# Altium PCB SpinASM.PcbDoc
Units mm, origin at the board's own origin, x right, y up, seen from the top; angles counter-clockwise.
Board outline 49.5 x 20 mm, 2 copper layers (Top Layer, Bottom Layer); 27 components, 26 nets, 115 pads, 71 vias.
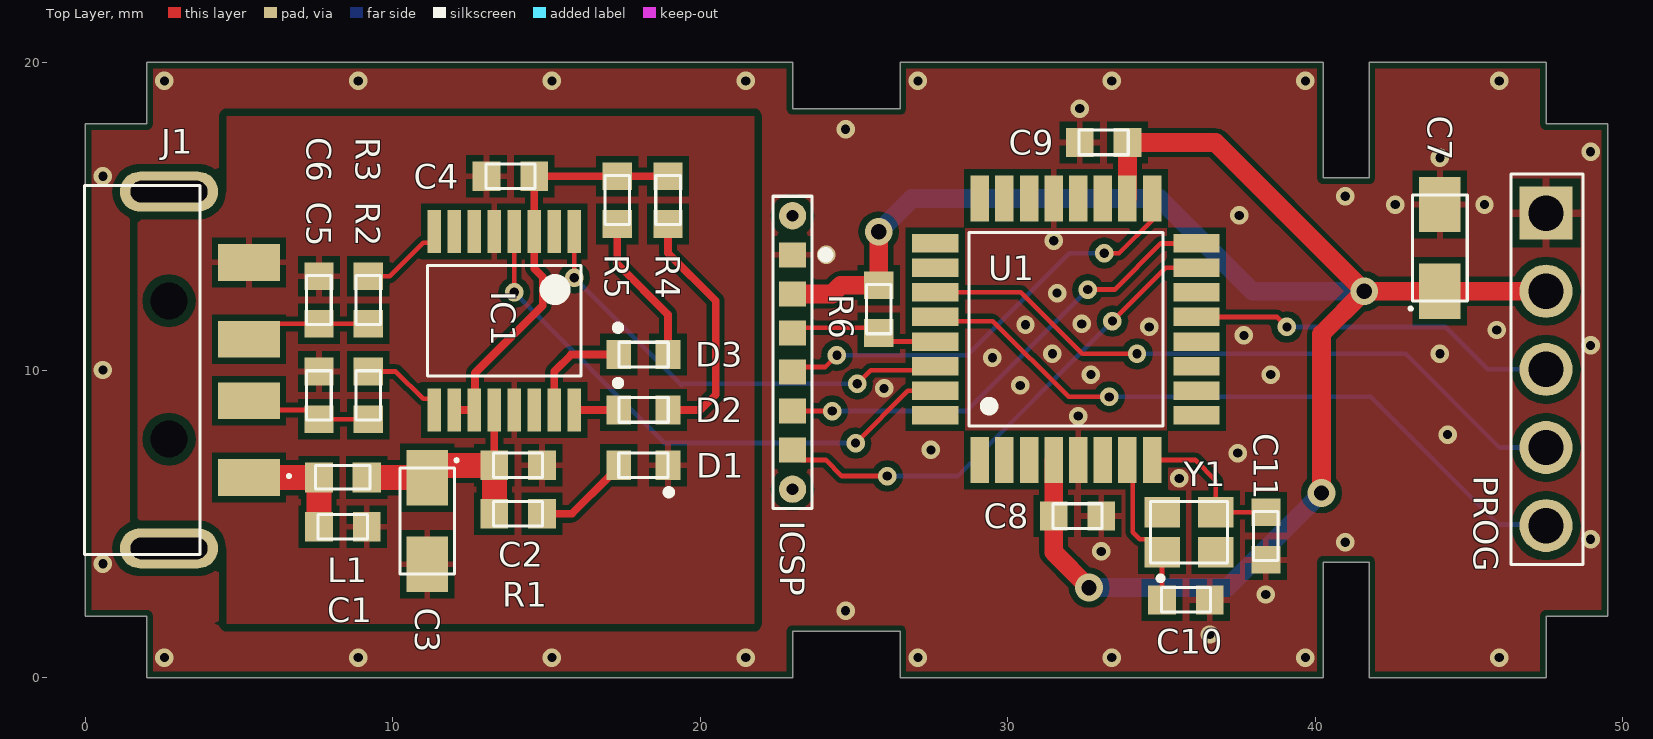
[diagram p0: Top Layer view]
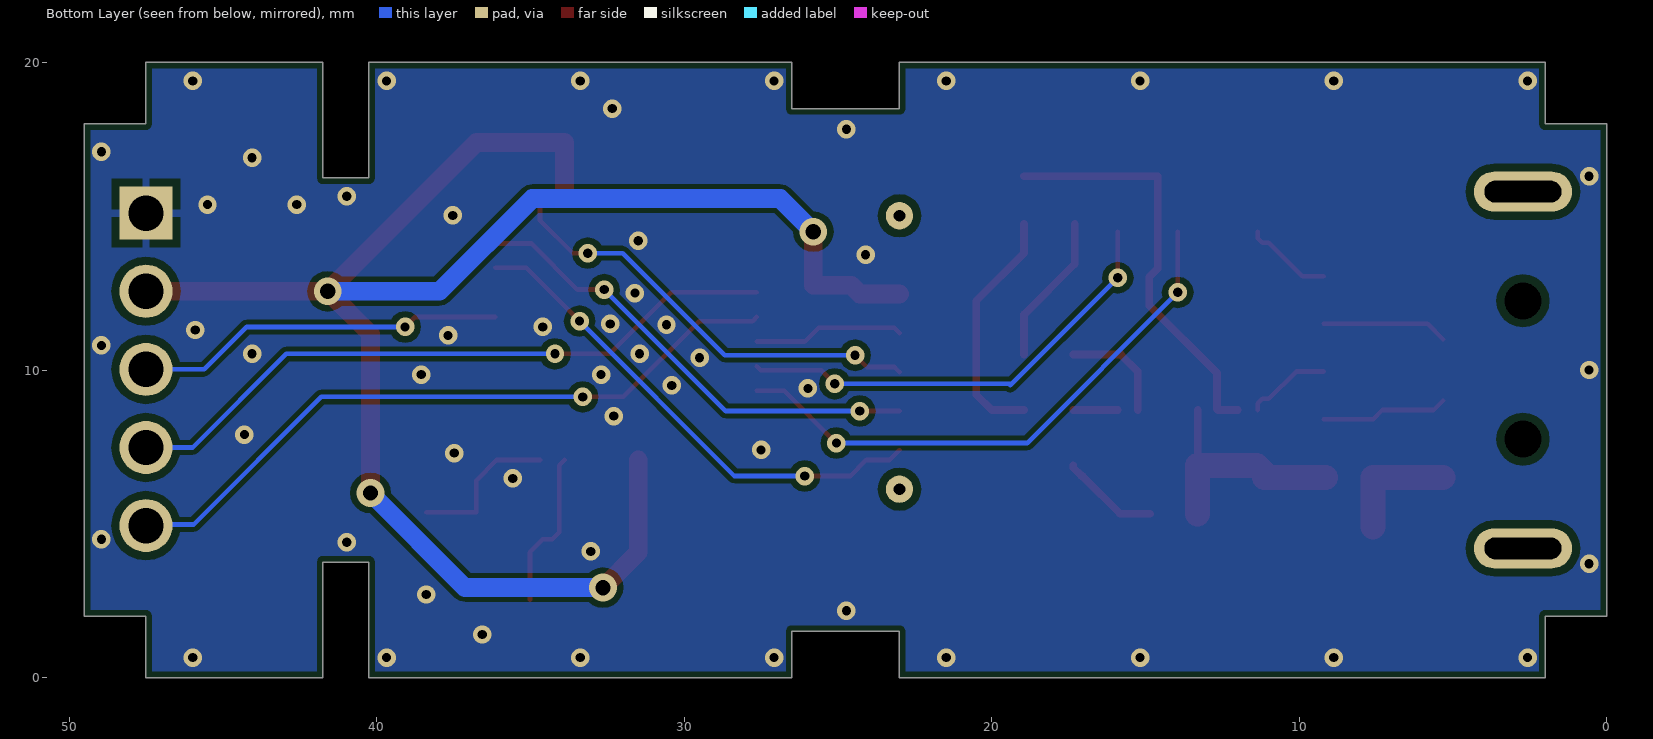
[diagram p1: Bottom Layer view, seen from below]
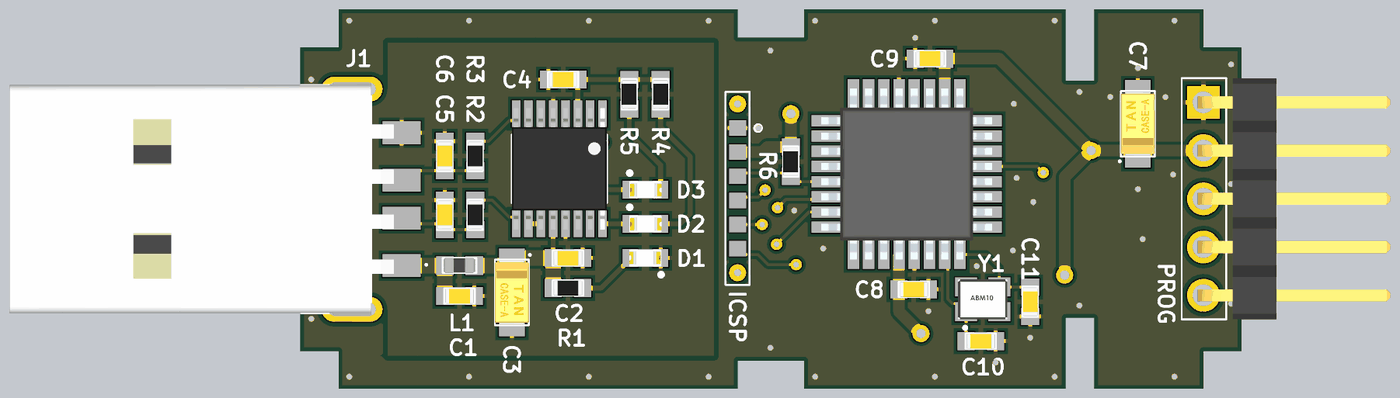
[diagram p2: 3D render of the assembled board from above, using the file's embedded part models]

## Layer stack, top to bottom
Top Solder: solder mask 0.0102, Solder Resist, Dk 3.5
Top Layer: signal copper 0.0356
Dielectric 1: dielectric 0.32, FR-4, Dk 4.8
Bottom Layer: signal copper 0.0356
Bottom Solder: solder mask 0.0102, Solder Resist, Dk 3.5

## Board outline
23,20 23,18.5 26.5,18.5 26.5,20 40.25,20 40.25,16.25 41.75,16.25 41.75,20 47.5,20 47.5,18 49.5,18 49.5,2 47.5,2 47.5,0 41.75,0 41.75,3.75 40.25,3.75 40.25,0 26.5,0 26.5,1.5 23,1.5 23,0 2,0 2,2 0,2 0,18 2,18 2,20

## Design rules (kind name [scope] priority, off if disabled: settings)
BoardOutlineClearance [All] p1: gap=0.2 ignorepadtopadclearanceinfootprint=FALSE
Clearance [All] p1: gap=0.152 ignorepadtopadclearanceinfootprint=FALSE except(0: Arc-Text Track-Text SMDPad-Text THPad-Text Via-Text Fill-Text Poly-Text Region-Text Text-Text; 0.127: Arc-Via Track-Via SMDPad-Via Via-Via; 0.203: SMDPad-Fill SMDPad-Poly SMDPad-Region Via-Fill Via-Poly Via-Region; 0.25: Arc-Hole Track-Hole SMDPad-Hole THPad-Hole Via-Hole Fill-Hole Poly-Hole Region-Hole Text-Hole; 0.254: THPad-Fill THPad-Poly THPad-Region Fill-Fill Fill-Poly Fill-Region Poly-Poly Poly-Region Region-Region)
ComponentClearance [All] p1 off: gap=0.127 collisioncheckmode=3 verticalgap=0.127 showdistances=TRUE
DiffPairsRouting [All] p1: maxlimit=0.254 minlimit=0.127 mostfreqgap=0.127 toplayer_minwidth=0.127 toplayer_maxwidth=25.4 toplayer_prefwidth=0.127 bottomlayer_minwidth=0.127 bottomlayer_maxwidth=25.4 bottomlayer_prefwidth=0.127 maxuncoupledlength=12.7
Height [All] p1: minheight=0 maxheight=1816.048 prefheight=12.7
HoleSize [All] p1: absolutevalues=TRUE maxlimit=6.3 minlimit=0.3 maxpercent=80.000 minpercent=20.000
HoleToHoleClearance [All] p1: gap=0.25 allowstackedmicrovias=FALSE
MinimumAnnularRing [All] p1: minimumring=0.076
MinimumSolderMaskSliver [All] p1: minsoldermaskwidth=0
PlaneClearance [All] p1: clearance=0.254
PlaneConnect PlaneConnectPowerPads [InPadClass('PowerPads')] p1: planeconnectstyle=Direct reliefexpansion=0.508 reliefentries=4 reliefconductorwidth=0.254 reliefairgap=0.254
PlaneConnect [All] p2: pad.planeconnectstyle=Relief pad.reliefexpansion=0.3 pad.reliefentries=4 pad.reliefconductorwidth=0.254 pad.reliefairgap=0.254 via.planeconnectstyle=Direct via.reliefexpansion=0.3 via.reliefentries=4 via.reliefconductorwidth=0.127 via.reliefairgap=0.127
PolygonConnect PolygonConnectPowerPads [All vs (InPadClass('PowerPads'))] p1: connectstyle=Direct reliefconductorwidth=0.254 reliefentries=4 polygonreliefangle="90 Angle" airgapwidth=0.254
PolygonConnect [All] p2: thpad.connectstyle=Relief thpad.reliefconductorwidth=0.254 thpad.reliefentries=4 thpad.polygonreliefangle="90 Angle" thpad.airgapwidth=0.254 smdpad.connectstyle=Relief smdpad.reliefconductorwidth=0.203 smdpad.reliefentries=4 smdpad.polygonreliefangle="90 Angle" smdpad.airgapwidth=0.203 via.connectstyle=Direct via.reliefconductorwidth=0.127 via.reliefentries=4 via.polygonreliefangle="90 Angle" via.airgapwidth=0.127
RoutingVias [All] p1: holewidth=0.3 width=0.6 viastyle="Through Hole" minholewidth=0.3 minwidth=0.6 maxholewidth=0.6 maxwidth=6.6
SilkToSilkClearance [All] p1 off: silktosilkclearance=0
SilkToSolderMaskClearance [IsPad] p1 off: minsilkscreentomaskgap=0.127 clearancetoexposedcopper=TRUE
SolderMaskExpansion [All] p1: expansion=0.075 istentingtop=FALSE
Width [All] p1: maxlimit=0.813 minlimit=0.152 preferedwidth=0.254
20 further rules are at their usual default settings.

## Components (designator, comment, footprint, x,y, rotation, side; value= is the part's Value field where it differs from the comment)
C1 "10n" CHIP_0603 8.375,4.9 r0 top
C2 "100n" CHIP_0603 14.075,6.9 r0 top
C3 "4.7u" TAN_1206 11.125,5.09 r270 top
C4 "100n" CHIP_0603 13.825,16.3 r180 top
C5 "47p" CHIP_0603 7.6,9.175 r90 top
C6 "47p" CHIP_0603 7.6,12.275 r90 top
C7 "10u" TAN_1206 44.05,13.97 r90 top
C8 "100n" CHIP_0603 32.265,5.25 r0 top
C9 "100n" CHIP_0603 33.115,17.4 r180 top
C10 "22p" CHIP_0603 35.79,2.525 r0 top
C11 "22p" CHIP_0603 38.39,4.6 r270 top
D1 "MP001249" LED_0603 18.15,6.9 r180 top
D2 "MP001249" LED_0603 18.15,8.7 r0 top
D3 "MP001249" LED_0603 18.15,10.5 r0 top
IC1 "FT230X" TSSOP-16 13.625,11.6 r270 top
ICSP "ICSP" AVRISP_POGO 23,10.57 r0 top
J1 "USB_MALE" USB_MALE 3,10 r270 top locked
L1 "BLM18AG331SN1D" INDC1608X10 8.39,6.5 r180 top
PROG "J_HEADER_5PINS_MALE_90" HEADER_5PINS_MALE_90 47.5,15.1 r270 top locked
R1 "330R" CHIP_R_0603 14.075,5.325 r0 top
R2 "27R" CHIP_R_0603 9.2,9.175 r90 top
R3 "27R" CHIP_R_0603 9.2,12.275 r90 top
R4 "330R" CHIP_R_0603 18.95,15.525 r270 top
R5 "330R" CHIP_R_0603 17.3,15.525 r270 top
R6 "10k" CHIP_R_0603 25.8,11.98 r270 top
U1 "ATMEGA328PB" TQFP32 31.89,11.325 r90 top
Y1 "ABM10" ABM10-167 35.89,4.725 r0 top

## Footprints (in the part's own frame and the unit in brackets; to place one, negate y for a bottom-side part, rotate by r counter-clockwise, add the part's x,y. Pads: shape width x height; smd on the part's side, far side on the other; paste and mask are expansions set on the pad)
ABM10-167 [mm]
  rect 1.15x1 smd: 1(-0.875,-0.65) 2(0.875,0.65) ""(-0.875,0.65) ""(0.875,-0.65)
  silkscreen extent -1.25,-1.56 1.25,1, body extent -1.3,-1.05 1.3,1.05, height 0.7
AVRISP_POGO [mil]
  rect 35x32 smd: 1(0,125) 2(0,75) 3(0,25) 4(0,-25) 5(0,-75) 6(0,-125)
  round 35 hole 15: ""(0,-175) ""(0,175)
  silkscreen extent -25,-200 46,200
CHIP_0603 [mm] "Chip Capacitor, 2-Leads, Body 1.60x0.80mm, IPC Medium Density"
  rect 0.9x0.95 smd: 1(-0.775,0) 2(0.775,0)
  silkscreen extent -0.8,-0.4 0.8,0.4, body extent -0.75,-0.4 0.75,0.4, height 0.65
CHIP_R_0603 [mm] "Chip Resistor, 2-Leads, Body 1.60x0.80mm, IPC Medium Density"
  rect 0.9x0.95 smd: 1(-0.775,0) 2(0.775,0)
  silkscreen extent -0.8,-0.4 0.8,0.4, body extent -0.75,-0.4 0.75,0.4, height 0.63
HEADER_5PINS_MALE_90 [mm]
  rect 1.725x1.725 hole 1.15: 1(0,0)
  round 1.725 hole 1.15: 2(2.54,0) 3(5.08,0) 4(7.62,0) 5(10.16,0)
  silkscreen extent -1.27,-1.14 11.43,1.2, body extent -1.27,-0.3 11.43,9.83, height 2.51
INDC1608X10 [mm] "Chip Inductor, 2-Leads, Body 1.60x0.80mm, IPC Medium Density"
  rect 0.92x0.98 smd: 1(-0.762,0) 2(0.79,0)
  silkscreen extent -0.87,-0.4 0.9,0.38, body extent -0.77,-0.4 0.83,0.4, height 1
LED_0603 [mm]
  rect 0.8x0.95 smd: 1(-0.8,0) 2(0.8,0)
  silkscreen extent -0.92,-0.4 0.81,0.97, body extent -0.8,-0.38 0.85,0.35, height 0.68
TAN_1206 [mm] "Chip Capacitor, 2-Leads, Body 3.20x1.60mm, IPC Medium Density"
  rect 1.8x1.35 smd: +(-1.41,0) -(1.41,0)
  silkscreen extent -2.02,-0.89 1.73,1, body extent -1.7,-0.9 1.7,0.9, height 1.8
TQFP32 [mm]
  rect 1.5x0.6 smd: 1(-4.25,2.8) 2(-4.25,2) 3(-4.25,1.2) 4(-4.25,0.4) 5(-4.25,-0.4) 6(-4.25,-1.2) 7(-4.25,-2) 8(-4.25,-2.8) 17(4.25,-2.8) 18(4.25,-2) 19(4.25,-1.2) 20(4.25,-0.4) 21(4.25,0.4) 22(4.25,1.2) 23(4.25,2) 24(4.25,2.8)
  rect 0.6x1.5 smd: 9(-2.8,-4.25) 10(-2,-4.25) 11(-1.2,-4.25) 12(-0.4,-4.25) 13(0.4,-4.25) 14(1.2,-4.25) 15(2,-4.25) 16(2.8,-4.25) 25(2.8,4.25) 26(2,4.25) 27(1.2,4.25) 28(0.4,4.25) 29(-0.4,4.25) 30(-1.2,4.25) 31(-2,4.25) 32(-2.8,4.25)
  silkscreen extent -3.15,-3.15 3.15,3.15, body extent -4.5,-4.5 4.5,4.5, height 1.2
TSSOP-16 [mm] "TSOP, 16-Leads, Body 4.95x4.35mm, Pitch 0.65mm, IPC Medium Density"
  rect 1.4x0.45 smd: 1(-2.9,2.275) 2(-2.9,1.625) 3(-2.9,0.975) 4(-2.9,0.325) 5(-2.9,-0.325) 6(-2.9,-0.975) 7(-2.9,-1.625) 8(-2.9,-2.275) 9(2.9,-2.275) 10(2.9,-1.625) 11(2.9,-0.975) 12(2.9,-0.325) 13(2.9,0.325) 14(2.9,0.975) 15(2.9,1.625) 16(2.9,2.275)
  silkscreen extent -1.8,-2.5 1.8,2.5, body extent -3.2,-2.5 3.2,2.5, height 1.2
USB_MALE [mm]
  rect 1.2x2 smd: 1(3.5,2.325) 2(1,2.325) 3(-1,2.325) 4(-3.5,2.325)
  oval 1.3x3.2 hole 0.7 slot 2.5 at 90 deg: 5(-5.8,-0.275) 5(5.8,-0.275)
  round 0.6 hole 1.2 unplated: ""(-2.25,-0.275) ""(2.25,-0.275)
  silkscreen extent -6,-3.03 6,3.67, body extent -6.23,-18.28 6.2,3.33, height 4

## Part data
C1: library part MC0603B103K500CT, "CAP CER 10NF 50V X7R 0603", Capacitance=10nF, Case Code (Imperial)=0603, Case Code (Metric)=1608, Dielectric=X7R, Manufacturer=Multicomp, Max Operating Temperature=125°C, Min Operating Temperature=-55°C, Supplier Part Number 1=1759102, Tolerance=10%, Voltage Rating=50V, Case/Package=0603, Category="Ceramic Capacitors", ComponentLink1Description=https://datasheet.ciiva.com/22675/1901289-22675356.pdf?src-supplier=Element14, ComponentLink1URL=https://datasheet.ciiva.com/22675/1901289-22675356.pdf?src-supplier=Element14, ComponentLink2Description=https://datasheet.ciiva.com/22675/1901289-22675357.pdf?src-supplier=Element14, ComponentLink2URL=https://datasheet.ciiva.com/22675/1901289-22675357.pdf?src-supplier=Element14, Manufacturer Part Number=MC0603B103K500CT, Number of Pins=2, Packaging="Tape and Reel", Price=0.0147, REACH SVHC=Unknown, RoHS=Yes, Stock 1=112880, Supplier 1=Farnell, Voltage Rating (DC)=50V, Width=0.8mm
C2 C4 C8 C9: library part MC0603B104K500CT, "CAP CER 100NF 50V X7R 0603", Capacitance=100nF, Case Code (Imperial)=0603, Case Code (Metric)=1608, Dielectric=X7R, Manufacturer=Multicomp, Max Operating Temperature=125°C, Min Operating Temperature=-55°C, Supplier Part Number 1=1759122, Tolerance=10%, Voltage Rating=50V, Case/Package=0603, ComponentLink1Description=https://datasheet.ciiva.com/22686/1901289-22686278.pdf?src-supplier=Element14, ComponentLink1URL=https://datasheet.ciiva.com/22686/1901289-22686278.pdf?src-supplier=Element14, ComponentLink2Description=https://datasheet.ciiva.com/22686/1901289-22686279.pdf?src-supplier=Element14, ComponentLink2URL=https://datasheet.ciiva.com/22686/1901289-22686279.pdf?src-supplier=Element14, ComponentLink3Description=https://datasheet.ciiva.com/22648/1901289-22648411.pdf?src-supplier=Element14, ComponentLink3URL=https://datasheet.ciiva.com/22648/1901289-22648411.pdf?src-supplier=Element14, Manufacturer Part Number=MC0603B104K500CT, Number of Pins=2, Packaging="Cut Tape", Price=0.0458, REACH SVHC=Unknown, RoHS=Yes, Stock 1=1057763, Supplier 1=Farnell, Voltage Rating (DC)=50V
C3: library part T491A475K010AT, "CAP TANT 4.7UF 10V", Capacitance=4.7uF, Case Code (Imperial)=1206, Case Code (Metric)=3216, Dielectric Material=Tantalum, ESR (Equivalent Series Resistance)=5R, Leakage Current=500nA, Manufacturer=KEMET, Max Operating Temperature=125°C, Min Operating Temperature=-55°C, Package Quantity=1, Ripple Current=122mA, Supplier Part Number 1=1457427, Tolerance=20%, Voltage=10V, Case/Package=1206, Category="Tantalum Capacitors", ComponentLink1Description=https://datasheet.ciiva.com/257/kem-t2005-t491-257408.pdf?src-supplier=Digi-Key, ComponentLink1URL=https://datasheet.ciiva.com/257/kem-t2005-t491-257408.pdf?src-supplier=Digi-Key, ComponentLink2Description=https://datasheet.ciiva.com/7668/1732747-7668019.pdf?src-supplier=Element14, ComponentLink2URL=https://datasheet.ciiva.com/7668/1732747-7668019.pdf?src-supplier=Element14, ComponentLink3Description=https://datasheet.ciiva.com/27052/1573417-27052564.pdf?src-supplier=Jameco, ComponentLink3URL=https://datasheet.ciiva.com/27052/1573417-27052564.pdf?src-supplier=Jameco, ComponentLink4Description=https://datasheet.ciiva.com/14589/70095774-14589016.pdf?src-supplier=Allied+Electronics, ComponentLink4URL=https://datasheet.ciiva.com/14589/70095774-14589016.pdf?src-supplier=Allied+Electronics, ComponentLink5Description=https://datasheet.ciiva.com/257/kem-t2005-t491-257409.pdf?src-supplier=Digi-Key, ComponentLink5URL=https://datasheet.ciiva.com/257/kem-t2005-t491-257409.pdf?src-supplier=Digi-Key, ComponentLink6Description=https://datasheet.ciiva.com/7668/1446014-7668021.pdf?src-supplier=Element14, ComponentLink6URL=https://datasheet.ciiva.com/7668/1446014-7668021.pdf?src-supplier=Element14, ComponentLink7Description=https://datasheet.ciiva.com/14588/70095774-14588348.pdf?src-supplier=Allied+Electronics, ComponentLink7URL=https://datasheet.ciiva.com/14588/70095774-14588348.pdf?src-supplier=Allied+Electronics, ComponentLink8Description=https://datasheet.ciiva.com/257/kem-t2005-t491-257407.pdf?src-supplier=Digi-Key, ComponentLink8URL=https://datasheet.ciiva.com/257/kem-t2005-t491-257407.pdf?src-supplier=Digi-Key, Depth=1.6mm, Dissipation Factor=6%, Features="General Purpose", Height=1.6mm, Height - Seated (Max)=0.071inch, Lead Free="Lead Free", Lead Pitch=1.2mm, Length=3.2mm, Life (Hours)=2000Hour, Manufacturer Part Number=T491A475K010AT, Mount="Surface Mount,PCB", Number of Pins=2, Packaging="Tape and Reel", Polarity=Polar, Price=0.241, Radiation Hardening=No, REACH SVHC="No SVHC", RoHS=Yes, Stock 1=5135, Supplier 1=Farnell, Termination=SMD/SMT, Voltage Rating=10V, Voltage Rating (DC)=10V, Width=1.6mm
C5 C6: library part MC0603N470J500CT, "CAP CER 47PF 50V C0G/NP0 0603", Capacitance=47pF, Case Code (Imperial)=0603, Case Code (Metric)=1608, Dielectric=C0G, Manufacturer=Multicomp, Max Operating Temperature=125°C, Min Operating Temperature=-55°C, Supplier Part Number 1=1759062, Temperature Coefficient=30ppm/°C, Tolerance=5%, Voltage Rating=50V, Case/Package=0603, ComponentLink1Description=https://datasheet.ciiva.com/22648/1901289-22648503.pdf?src-supplier=Element14, ComponentLink1URL=https://datasheet.ciiva.com/22648/1901289-22648503.pdf?src-supplier=Element14, ComponentLink2Description=https://datasheet.ciiva.com/22682/1901289-22682812.pdf?src-supplier=Element14, ComponentLink2URL=https://datasheet.ciiva.com/22682/1901289-22682812.pdf?src-supplier=Element14, ComponentLink3Description=https://datasheet.ciiva.com/22682/1901289-22682813.pdf?src-supplier=Element14, ComponentLink3URL=https://datasheet.ciiva.com/22682/1901289-22682813.pdf?src-supplier=Element14, Manufacturer Part Number=MC0603N470J500CT, Number of Pins=2, Packaging="Tape and Reel", Price=0.02, Pricing="10=0.0246, 100=0.0199, 500=0.0123, 1000=0.0097, 2000=0.0089 (EUR)", REACH SVHC=Unknown, RoHS=Yes, Stock=148629, Supplier 1=Farnell, Voltage Rating (DC)=50V, Width=0.8mm
C7: library part T491A106K016AT, "CAP TANT 10UF 16V", Capacitance=10uF, Case Code (Imperial)=1206, Case Code (Metric)=3216, Dielectric Material=Tantalum, ESR (Equivalent Series Resistance)=7R, Leakage Current=1.6uA, Manufacturer=KEMET, Max Operating Temperature=125°C, Min Operating Temperature=-55°C, Package Quantity=1, Ripple Current=104mA, Supplier Part Number 1=1457414, Tolerance=10%, Voltage=16V, Case/Package=1206, Category="Tantalum Capacitors", ComponentLink1Description=https://datasheet.ciiva.com/7696/1732745-7696294.pdf?src-supplier=Element14, ComponentLink1URL=https://datasheet.ciiva.com/7696/1732745-7696294.pdf?src-supplier=Element14, ComponentLink2Description=https://datasheet.ciiva.com/34302/1573257-34302505.pdf?src-supplier=Jameco, ComponentLink2URL=https://datasheet.ciiva.com/34302/1573257-34302505.pdf?src-supplier=Jameco, ComponentLink3Description=https://datasheet.ciiva.com/7696/1854511-7696293.pdf?src-supplier=Element14, ComponentLink3URL=https://datasheet.ciiva.com/7696/1854511-7696293.pdf?src-supplier=Element14, ComponentLink4Description=https://datasheet.ciiva.com/14586/70095774-14586694.pdf?src-supplier=Allied+Electronics, ComponentLink4URL=https://datasheet.ciiva.com/14586/70095774-14586694.pdf?src-supplier=Allied+Electronics, ComponentLink5Description=https://datasheet.ciiva.com/6248/kem-t2005-t491-6248087.pdf?src-supplier=Digi-Key, ComponentLink5URL=https://datasheet.ciiva.com/6248/kem-t2005-t491-6248087.pdf?src-supplier=Digi-Key, ComponentLink6Description=https://datasheet.ciiva.com/6248/kem-t2005-t491-6248088.pdf?src-supplier=Digi-Key, ComponentLink6URL=https://datasheet.ciiva.com/6248/kem-t2005-t491-6248088.pdf?src-supplier=Digi-Key, ComponentLink7Description=https://datasheet.ciiva.com/14113/t491serie-eng-tds-14113132.pdf?src-supplier=Distrelec, ComponentLink7URL=https://datasheet.ciiva.com/14113/t491serie-eng-tds-14113132.pdf?src-supplier=Distrelec, ComponentLink8Description=https://datasheet.ciiva.com/7696/1923792-7696431.pdf?src-supplier=Element14, ComponentLink8URL=https://datasheet.ciiva.com/7696/1923792-7696431.pdf?src-supplier=Element14, ComponentLink9Description=https://datasheet.ciiva.com/7696/1854511-7696295.pdf?src-supplier=Element14, ComponentLink9URL=https://datasheet.ciiva.com/7696/1854511-7696295.pdf?src-supplier=Element14, ComponentLink10Description=https://datasheet.ciiva.com/14605/70095774-14605543.pdf?src-supplier=Allied+Electronics, ComponentLink10URL=https://datasheet.ciiva.com/14605/70095774-14605543.pdf?src-supplier=Allied+Electronics, ComponentLink11Description=https://datasheet.ciiva.com/7696/1446014-7696296.pdf?src-supplier=Element14, ComponentLink11URL=https://datasheet.ciiva.com/7696/1446014-7696296.pdf?src-supplier=Element14, ComponentLink12Description=https://datasheet.ciiva.com/6248/kem-t2005-t491-6248089.pdf?src-supplier=Digi-Key, ComponentLink12URL=https://datasheet.ciiva.com/6248/kem-t2005-t491-6248089.pdf?src-supplier=Digi-Key, ComponentLink13Description=https://datasheet.ciiva.com/12882/kem-t2005-t491-12882730.pdf?src-supplier=Mouser, ComponentLink13URL=https://datasheet.ciiva.com/12882/kem-t2005-t491-12882730.pdf?src-supplier=Mouser, ComponentLink14Description=https://datasheet.ciiva.com/39123/kem-t2005-t491-39123278.pdf?src-supplier=Onlinecomponents.com, ComponentLink14URL=https://datasheet.ciiva.com/39123/kem-t2005-t491-39123278.pdf?src-supplier=Onlinecomponents.com, ComponentLink15Description=https://datasheet.ciiva.com/29244/458306-da-01-de-kondensator-10uf-3216-10pr-16v-85c-29244588.pdf?src-supplier=Conrad, ComponentLink15URL=https://datasheet.ciiva.com/29244/458306-da-01-de-kondensator-10uf-3216-10pr-16v-85c-29244588.pdf?src-supplier=Conrad, Depth=1.6mm, Dissipation Factor=10%, Failure Rate=0.001%, Features="General Purpose", Height=1.6mm, Height - Seated (Max)=0.071inch, Lead Free="Lead Free", Lead Pitch=1.2mm, Length=3.2mm, Life (Hours)=2000Hour, Manufacturer Part Number=T491A106K016AT, Mount="Surface Mount,PCB", Number of Pins=2, Packaging="Tape and Reel", Polarity=Polar, Price=0.167, Pricing="5=0.30300, 50=0.16000, 250=0.13300, 500=0.12000, 1000=0.10200 (EUR)", Radiation Hardening=No, REACH SVHC="No SVHC", RoHS=Yes, Stock=36020, Supplier 1=Farnell, Termination=SMD/SMT, Voltage Rating=16V, Voltage Rating (DC)=16V, Width=1.6mm
C10 C11: library part MC0603N220J500CT, "CAP CER 22PF 50V C0G/NP0 0603", Capacitance=22pF, Case Code (Imperial)=0603, Case Code (Metric)=1608, Dielectric=C0G, Manufacturer=Multicomp, Max Operating Temperature=125°C, Min Operating Temperature=-55°C, Supplier Part Number 1=1759057, Temperature Coefficient=30ppm/°C, Tolerance=5%, Voltage Rating=50V, Case/Package=0603, Category="Ceramic Capacitors", ComponentLink1Description=https://datasheet.ciiva.com/22648/1901289-22648486.pdf?src-supplier=Element14, ComponentLink1URL=https://datasheet.ciiva.com/22648/1901289-22648486.pdf?src-supplier=Element14, Manufacturer Part Number=MC0603N220J500CT, Number of Pins=2, Packaging="Cut Tape", Price=0.024, REACH SVHC=Unknown, RoHS=Yes, Stock=53792, Supplier 1=Farnell, Voltage Rating (DC)=50V, Width=0.8mm
D1 D2 D3: "LED RED CMS 603 20 mA 2.5 V 629 nm", Manufacturer=Multicomp, Supplier Part Number 1=3265380, Manufacturer Part Number=MP001249, Price=0.0718, RoHS=No, Supplier 1=Farnell
IC1: library part FT230XS-R, "USB-to-UART 1-CH 512byte FIFO 5V 16-Pin SSOP T/R", Case/Package=SSOP, Manufacturer=FTDI, Max Operating Temperature=85°C, Max Supply Voltage=5.5V, Min Operating Temperature=-40°C, Min Supply Voltage=2.97V, Operating Supply Current=8mA, Operating Supply Voltage=5V, Package Quantity=3000, Supplier Part Number 1=2081321, Category="Interface ICs", ComponentLink1Description=https://datasheet.ciiva.com/1787/ds-ft230x-1787315.pdf?src-supplier=Digi-Key, ComponentLink1URL=https://datasheet.ciiva.com/1787/ds-ft230x-1787315.pdf?src-supplier=Digi-Key, ComponentLink2Description=https://datasheet.ciiva.com/4787/ds-ft230x-5395-4787571.pdf?src-supplier=Mouser, ComponentLink2URL=https://datasheet.ciiva.com/4787/ds-ft230x-5395-4787571.pdf?src-supplier=Mouser, ComponentLink3Description=https://datasheet.ciiva.com/30478/0900766b811020cb-30478167.pdf?src-supplier=RSComponents, ComponentLink3URL=https://datasheet.ciiva.com/30478/0900766b811020cb-30478167.pdf?src-supplier=RSComponents, ComponentLink4Description=https://datasheet.ciiva.com/1787/ft-x-series-1787316.pdf?src-supplier=Digi-Key, ComponentLink4URL=https://datasheet.ciiva.com/1787/ft-x-series-1787316.pdf?src-supplier=Digi-Key, ComponentLink5Description=https://datasheet.ciiva.com/1787/ft-x-series-1787317.pdf?src-supplier=Digi-Key, ComponentLink5URL=https://datasheet.ciiva.com/1787/ft-x-series-1787317.pdf?src-supplier=Digi-Key, Data Rate=12Mbps, Height=0.059inch, Interface=UART,USB, Length=5mm, Manufacturer Part Number=FT230XS-R, Mount="Surface Mount", Number of Channels=1, Number of Pins=16, Packaging="Tape and Reel", Price=1.94, RoHS=Yes, Stock 1=45264, Supplier 1=Farnell, Weight=0.004586oz, Width=0.157inch
ICSP: library part AVRISP_POGO
J1: library part 48037-2200, "USB Connectors USB A PLUG SMT STR S SHELL LEG 3.8mm L/F", Color=Black, Current Rating=1.5A, Insulation Resistance=1GR, Manufacturer=Molex, Max Operating Temperature=85°C, Max Voltage Rating (AC)=150V, Min Operating Temperature=-20°C, Supplier Part Number 1=2313729, Category=Connectors, ComponentLink1Description=https://datasheet.ciiva.com/22654/1701284-22654928.pdf?src-supplier=Element14, ComponentLink1URL=https://datasheet.ciiva.com/22654/1701284-22654928.pdf?src-supplier=Element14, ComponentLink2Description=https://datasheet.ciiva.com/16148/1690390480372200-io-nectors-16148911.pdf?src-supplier=Onlinecomponents.com, ComponentLink2URL=https://datasheet.ciiva.com/16148/1690390480372200-io-nectors-16148911.pdf?src-supplier=Onlinecomponents.com, ComponentLink3Description=https://datasheet.ciiva.com/4598/0480372200-io-connectors-146329-4598955.pdf?src-supplier=Mouser, ComponentLink3URL=https://datasheet.ciiva.com/4598/0480372200-io-connectors-146329-4598955.pdf?src-supplier=Mouser, ComponentLink4Description=https://datasheet.ciiva.com/30049/331280480372200-io-nectors-30049803.pdf?src-supplier=Onlinecomponents.com, ComponentLink4URL=https://datasheet.ciiva.com/30049/331280480372200-io-nectors-30049803.pdf?src-supplier=Onlinecomponents.com, ComponentLink5Description=https://datasheet.ciiva.com/16667/0480372200-io-connectors-16667879.pdf?src-supplier=Avnet+Europe, ComponentLink5URL=https://datasheet.ciiva.com/16667/0480372200-io-connectors-16667879.pdf?src-supplier=Avnet+Europe, Connector Type=USB,Plug, Contact Material=Brass, Contact Plating=Gold, Gender=Male, Halogen Free="Low Halogen", Housing Material=Nylon, Manufacturer Part Number=48037-2200, Mount="Surface Mount", Number of Circuits=4, Number of Contacts=4, Number of Ports=1, Number of Rows=1, Number of Terminals=4, Orientation="Right Angle", Packaging="Tape and Reel", Pitch=2mm, Price=0.794, Radiation Hardening=No, REACH SVHC=Unknown, RoHS=Yes, Stock=1058, Supplier 1=Farnell, Termination=Solder, Voltage Rating=150V, Voltage Rating (AC)=150V
L1: "MURATA         BLM18AG331SN1D            FERRITE BEAD, 0.3OHM, 500MA, 0603", Case Code (Imperial)=0603, Case Code (Metric)=1608, Current Rating=500mA, DC Resistance (DCR)=300mR, ESR (Equivalent Series Resistance)=330R, Manufacturer=Murata, Max Operating Temperature=125°C, Min Operating Temperature=-55°C, Package Quantity=1, Supplier Part Number 1=1515675, Test Frequency=100MHz, Tolerance=25%, Case/Package=0603, Category=Inductors, ComponentLink1Description=https://datasheet.ciiva.com/1466/356366-1466928.pdf?src-supplier=Element14, ComponentLink1URL=https://datasheet.ciiva.com/1466/356366-1466928.pdf?src-supplier=Element14, ComponentLink2Description=https://datasheet.ciiva.com/19458/1844740-19458419.pdf?src-supplier=Jameco, ComponentLink2URL=https://datasheet.ciiva.com/19458/1844740-19458419.pdf?src-supplier=Jameco, ComponentLink3Description=https://datasheet.ciiva.com/18093/getdatasheetpartid-220856-18093188.pdf?src-supplier=Verical, ComponentLink3URL=https://datasheet.ciiva.com/18093/getdatasheetpartid-220856-18093188.pdf?src-supplier=Verical, ComponentLink4Description=https://datasheet.ciiva.com/11800/0900766b811b5866-11800887.pdf?src-supplier=RSComponents, ComponentLink4URL=https://datasheet.ciiva.com/11800/0900766b811b5866-11800887.pdf?src-supplier=RSComponents, ComponentLink5Description=https://datasheet.ciiva.com/41449/001171689-da-01-en-chip-drossel0603-330r-500ma-1-6x0-8mm-41449370.pdf?src-supplier=Conrad, ComponentLink5URL=https://datasheet.ciiva.com/41449/001171689-da-01-en-chip-drossel0603-330r-500ma-1-6x0-8mm-41449370.pdf?src-supplier=Conrad, ComponentLink6Description=https://datasheet.ciiva.com/41449/001172225-da-01-en-drossel-0603-330r-1-6x0-8mm-4000st-41449519.pdf?src-supplier=Conrad, ComponentLink6URL=https://datasheet.ciiva.com/41449/001172225-da-01-en-drossel-0603-330r-1-6x0-8mm-4000st-41449519.pdf?src-supplier=Conrad, ComponentLink7Description=https://datasheet.ciiva.com/16420/l0110s0100blm18a-16420761.pdf?src-supplier=Future+Electronics, ComponentLink7URL=https://datasheet.ciiva.com/16420/l0110s0100blm18a-16420761.pdf?src-supplier=Future+Electronics, ComponentLink8Description=https://datasheet.ciiva.com/1012/l0110s0100blm18a-1012044.pdf?src-supplier=Digi-Key, ComponentLink8URL=https://datasheet.ciiva.com/1012/l0110s0100blm18a-1012044.pdf?src-supplier=Digi-Key, ComponentLink9Description=https://datasheet.ciiva.com/3081/l0110s0100blm18a-3081612.pdf?src-supplier=Avnet, ComponentLink9URL=https://datasheet.ciiva.com/3081/l0110s0100blm18a-3081612.pdf?src-supplier=Avnet, ComponentLink10Description=https://datasheet.ciiva.com/1012/l0110s0100blm18a-1012045.pdf?src-supplier=Digi-Key, ComponentLink10URL=https://datasheet.ciiva.com/1012/l0110s0100blm18a-1012045.pdf?src-supplier=Digi-Key, ComponentLink11Description=https://datasheet.ciiva.com/17279/l0110s0100blm18a-17279501.pdf?src-supplier=Avnet+Europe, ComponentLink11URL=https://datasheet.ciiva.com/17279/l0110s0100blm18a-17279501.pdf?src-supplier=Avnet+Europe, ComponentLink12Description=https://datasheet.ciiva.com/1012/l0110s0100blm18a-1012046.pdf?src-supplier=Digi-Key, ComponentLink12URL=https://datasheet.ciiva.com/1012/l0110s0100blm18a-1012046.pdf?src-supplier=Digi-Key, ComponentLink13Description=https://datasheet.ciiva.com/1466/356366-1466927.pdf?src-supplier=Element14, ComponentLink13URL=https://datasheet.ciiva.com/1466/356366-1466927.pdf?src-supplier=Element14, Core Material=Ferrite, Depth=0.8mm, Height=0.8mm, Impedance=330R, Lead Free="Lead Free", Length=1.6mm, Manufacturer Part Number=BLM18AG331SN1D, Material=Ferrite,Steel, Max Current Rating=500mA, Max DC Current=500mA, Number of Circuits=1, Number of Lines=1, Number of Pins=2, Packaging="Tape and Reel", Price=0.0361, REACH SVHC="No SVHC", RoHS=Yes, Shielding=Unshielded, Stock 1=4308, Supplier 1=Farnell, Termination=SMD/SMT, Width=0.8mm
R1 R4 R5: library part CRCW0603330RFKEA, "RES SMD 330R OHM 1% 1/10W 0603", Case Code (Imperial)=0603, Case Code (Metric)=1608, Manufacturer=Vishay, Max Operating Temperature=155°C, Max Power Dissipation=100mW, Min Operating Temperature=-55°C, Package Quantity=10, Supplier Part Number 1=1469803, Temperature Coefficient=100ppm/°C, Tolerance=1%, Voltage Rating=75V, Case/Package=0603, Category="Chip SMD Resistors", ComponentLink1Description=https://datasheet.ciiva.com/11809/0900766b80d98afc-11809055.pdf?src-supplier=RSComponents, ComponentLink1URL=https://datasheet.ciiva.com/11809/0900766b80d98afc-11809055.pdf?src-supplier=RSComponents, ComponentLink2Description=https://datasheet.ciiva.com/2465/dcrcwe3-2465777.pdf?src-supplier=Digi-Key, ComponentLink2URL=https://datasheet.ciiva.com/2465/dcrcwe3-2465777.pdf?src-supplier=Digi-Key, ComponentLink3Description=https://datasheet.ciiva.com/2465/dcrcwe3-2465778.pdf?src-supplier=Digi-Key, ComponentLink3URL=https://datasheet.ciiva.com/2465/dcrcwe3-2465778.pdf?src-supplier=Digi-Key, ComponentLink4Description=https://datasheet.ciiva.com/2465/dcrcwe3-2465779.pdf?src-supplier=Digi-Key, ComponentLink4URL=https://datasheet.ciiva.com/2465/dcrcwe3-2465779.pdf?src-supplier=Digi-Key, ComponentLink5Description=https://datasheet.ciiva.com/5543/dcrcwe3-109170-5543013.pdf?src-supplier=Mouser, ComponentLink5URL=https://datasheet.ciiva.com/5543/dcrcwe3-109170-5543013.pdf?src-supplier=Mouser, ComponentLink6Description=https://datasheet.ciiva.com/16772/70201119-16772038.pdf?src-supplier=Allied+Electronics, ComponentLink6URL=https://datasheet.ciiva.com/16772/70201119-16772038.pdf?src-supplier=Allied+Electronics, ComponentLink7Description=https://datasheet.ciiva.com/26316/fld-crcw-e3-data-en-26316538.pdf?src-supplier=Distrelec, ComponentLink7URL=https://datasheet.ciiva.com/26316/fld-crcw-e3-data-en-26316538.pdf?src-supplier=Distrelec, ComponentLink8Description=https://datasheet.ciiva.com/15225/getdatasheetpartid-32830-15225339.pdf?src-supplier=Verical, ComponentLink8URL=https://datasheet.ciiva.com/15225/getdatasheetpartid-32830-15225339.pdf?src-supplier=Verical, ComponentLink9Description=https://datasheet.ciiva.com/16372/dcrcwe3-16372971.pdf?src-supplier=Future+Electronics, ComponentLink9URL=https://datasheet.ciiva.com/16372/dcrcwe3-16372971.pdf?src-supplier=Future+Electronics, ComponentLink10Description=https://datasheet.ciiva.com/16893/dcrcwe3-16893227.pdf?src-supplier=Avnet+Europe, ComponentLink10URL=https://datasheet.ciiva.com/16893/dcrcwe3-16893227.pdf?src-supplier=Avnet+Europe, ComponentLink11Description=https://datasheet.ciiva.com/7777/1697337-7777311.pdf?src-supplier=Element14, ComponentLink11URL=https://datasheet.ciiva.com/7777/1697337-7777311.pdf?src-supplier=Element14, Composition="Thick Film", Contact Plating=Tin, Depth=0.85mm, Features="Automotive AEC-Q200", Height=0.45mm, Lead Free="Lead Free", Length=1.55mm, Manufacturer Part Number=CRCW0603330RFKEA, Military Standard=Not, Mount="Surface Mount", Number of Terminations=2, Packaging="Tape and Reel", Power Rating=100mW, Price=0.0626, Pricing="10=0.04600, 100=0.01830, 500=0.01570, 1000=0.00710, 2500=0.00550 (EUR)", Radiation Hardening=No, REACH SVHC=Unknown, Resistance=330R, RoHS=Yes, Stock=92220, Supplier 1=Farnell, Termination=SMD/SMT, Voltage Rating (DC)=75V, Weight=7.1E-05oz, Width=0.033inch
R2 R3: library part CRCW060327R0FKEA, "RES SMD 27 OHM 1% 1/10W 0603", Case Code (Imperial)=0603, Case Code (Metric)=1608, Manufacturer=Vishay, Max Operating Temperature=155°C, Min Operating Temperature=-55°C, Package Quantity=5000, Power Rating=100mW, Supplier Part Number 1=2141211, Temperature Coefficient=100ppm/°C, Tolerance=1%, Voltage Rating=75V, Case/Package=0603, Category="Chip SMD Resistors", ComponentLink1Description=https://datasheet.ciiva.com/11809/0900766b80d98afc-11809194.pdf?src-supplier=RSComponents, ComponentLink1URL=https://datasheet.ciiva.com/11809/0900766b80d98afc-11809194.pdf?src-supplier=RSComponents, ComponentLink2Description=https://datasheet.ciiva.com/5541/dcrcwe3-109170-5541782.pdf?src-supplier=Mouser, ComponentLink2URL=https://datasheet.ciiva.com/5541/dcrcwe3-109170-5541782.pdf?src-supplier=Mouser, ComponentLink3Description=https://datasheet.ciiva.com/7792/125364-7792167.pdf?src-supplier=Element14, ComponentLink3URL=https://datasheet.ciiva.com/7792/125364-7792167.pdf?src-supplier=Element14, ComponentLink4Description=https://datasheet.ciiva.com/22704/1697337-22704440.pdf?src-supplier=Element14, ComponentLink4URL=https://datasheet.ciiva.com/22704/1697337-22704440.pdf?src-supplier=Element14, ComponentLink5Description=https://datasheet.ciiva.com/7672/1697337-7672889.pdf?src-supplier=Element14, ComponentLink5URL=https://datasheet.ciiva.com/7672/1697337-7672889.pdf?src-supplier=Element14, ComponentLink6Description=https://datasheet.ciiva.com/7672/1697337-7672890.pdf?src-supplier=Element14, ComponentLink6URL=https://datasheet.ciiva.com/7672/1697337-7672890.pdf?src-supplier=Element14, ComponentLink7Description=https://datasheet.ciiva.com/16882/dcrcwe3-16882811.pdf?src-supplier=Avnet+Europe, ComponentLink7URL=https://datasheet.ciiva.com/16882/dcrcwe3-16882811.pdf?src-supplier=Avnet+Europe, ComponentLink8Description=https://datasheet.ciiva.com/22870/70201119-22870860.pdf?src-supplier=Allied+Electronics, ComponentLink8URL=https://datasheet.ciiva.com/22870/70201119-22870860.pdf?src-supplier=Allied+Electronics, ComponentLink9Description=https://datasheet.ciiva.com/16498/dcrcwe3-16498302.pdf?src-supplier=Future+Electronics, ComponentLink9URL=https://datasheet.ciiva.com/16498/dcrcwe3-16498302.pdf?src-supplier=Future+Electronics, ComponentLink10Description=https://datasheet.ciiva.com/16780/70201119-16780479.pdf?src-supplier=Allied+Electronics, ComponentLink10URL=https://datasheet.ciiva.com/16780/70201119-16780479.pdf?src-supplier=Allied+Electronics, Composition="Thick Film", Contact Plating=Tin, Depth=0.85mm, Height=0.45mm, Lead Free="Lead Free", Length=1.55mm, Manufacturer Part Number=CRCW060327R0FKEA, Military Standard=Not, Mount="Surface Mount", Number of Pins=2, Packaging="Tape and Reel", Price=0.0181, Radiation Hardening=No, REACH SVHC=Unknown, Resistance=27R, RoHS=Yes, Stock 1=1183, Supplier 1=Farnell, Termination=SMD/SMT, Voltage Rating (DC)=75V, Weight=7.1E-05oz, Width=0.85mm
R6: library part CRCW060310K0FKEA, "RES SMD 10K OHM 1% 1/10W 0603", Case Code (Imperial)=0603, Case Code (Metric)=1608, Manufacturer=Vishay, Max Operating Temperature=155°C, Max Power Dissipation=100mW, Min Operating Temperature=-55°C, Package Quantity=10, Resistance=10kR, Supplier Part Number 1=1469748, Temperature Coefficient=100ppm/°C, Tolerance=1%, Voltage Rating=75V, Case/Package=0603, ComponentLink1Description=https://datasheet.ciiva.com/11809/0900766b80d98afc-11809037.pdf?src-supplier=RSComponents, ComponentLink1URL=https://datasheet.ciiva.com/11809/0900766b80d98afc-11809037.pdf?src-supplier=RSComponents, ComponentLink2Description=https://datasheet.ciiva.com/16886/dcrcw-16886037.pdf?src-supplier=Avnet+Europe, ComponentLink2URL=https://datasheet.ciiva.com/16886/dcrcw-16886037.pdf?src-supplier=Avnet+Europe, ComponentLink3Description=https://datasheet.ciiva.com/26821/getdatasheetpartid-86831-26821109.pdf?src-supplier=Verical, ComponentLink3URL=https://datasheet.ciiva.com/26821/getdatasheetpartid-86831-26821109.pdf?src-supplier=Verical, ComponentLink4Description=https://datasheet.ciiva.com/16754/70201119-16754710.pdf?src-supplier=Allied+Electronics, ComponentLink4URL=https://datasheet.ciiva.com/16754/70201119-16754710.pdf?src-supplier=Allied+Electronics, ComponentLink5Description=https://datasheet.ciiva.com/16719/70201119-16719704.pdf?src-supplier=Allied+Electronics, ComponentLink5URL=https://datasheet.ciiva.com/16719/70201119-16719704.pdf?src-supplier=Allied+Electronics, ComponentLink6Description=https://datasheet.ciiva.com/2465/dcrcwe3-2465513.pdf?src-supplier=Digi-Key, ComponentLink6URL=https://datasheet.ciiva.com/2465/dcrcwe3-2465513.pdf?src-supplier=Digi-Key, ComponentLink7Description=https://datasheet.ciiva.com/5543/dcrcwe3-109170-5543001.pdf?src-supplier=Mouser, ComponentLink7URL=https://datasheet.ciiva.com/5543/dcrcwe3-109170-5543001.pdf?src-supplier=Mouser, ComponentLink8Description=https://datasheet.ciiva.com/2465/dcrcwe3-2465514.pdf?src-supplier=Digi-Key, ComponentLink8URL=https://datasheet.ciiva.com/2465/dcrcwe3-2465514.pdf?src-supplier=Digi-Key, ComponentLink9Description=https://datasheet.ciiva.com/46385/1697337-46385498.pdf?src-supplier=Element14, ComponentLink9URL=https://datasheet.ciiva.com/46385/1697337-46385498.pdf?src-supplier=Element14, ComponentLink10Description=https://datasheet.ciiva.com/2465/dcrcwe3-2465515.pdf?src-supplier=Digi-Key, ComponentLink10URL=https://datasheet.ciiva.com/2465/dcrcwe3-2465515.pdf?src-supplier=Digi-Key, ComponentLink11Description=https://datasheet.ciiva.com/3256/dcrcwe3-3256939.pdf?src-supplier=Avnet, ComponentLink11URL=https://datasheet.ciiva.com/3256/dcrcwe3-3256939.pdf?src-supplier=Avnet, ComponentLink12Description=https://datasheet.ciiva.com/3256/dcrcwe3-3256940.pdf?src-supplier=Avnet, ComponentLink12URL=https://datasheet.ciiva.com/3256/dcrcwe3-3256940.pdf?src-supplier=Avnet, ComponentLink13Description=https://datasheet.ciiva.com/16209/dcrcwe3-16209164.pdf?src-supplier=Future+Electronics, ComponentLink13URL=https://datasheet.ciiva.com/16209/dcrcwe3-16209164.pdf?src-supplier=Future+Electronics, ComponentLink14Description=https://datasheet.ciiva.com/26314/fld-crcw-e3-data-en-26314749.pdf?src-supplier=Distrelec, ComponentLink14URL=https://datasheet.ciiva.com/26314/fld-crcw-e3-data-en-26314749.pdf?src-supplier=Distrelec, Composition="Thick Film", Contact Plating=Tin, Depth=0.85mm, Features="Automotive AEC-Q200", Height=0.45mm, Lead Free="Lead Free", Length=1.55mm, Manufacturer Part Number=CRCW060310K0FKEA, Military Standard=Not, Number of Pins=2, Number of Terminations=2, Packaging="Tape and Reel", Power Rating=100mW, Price=0.0131, Pricing="10=0.0169, 100=0.013, 500=0.0113, 1000=0.008 (EUR)", Radiation Hardening=No, REACH SVHC=Unknown, RoHS=Yes, Stock=1391124, Supplier 1=Farnell, Termination=SMD/SMT, Voltage Rating (DC)=75V, Weight=7.1E-05oz, Width=0.033inch
U1: library part ATMEGA328PB-AU, "IC MCU 8BIT 32KB FLASH 32TQFP", Case/Package=TQFP, Manufacturer=Microchip, Supplier Part Number 1=2523203, Category=Microcontrollers, ComponentLink1Description=http://www.farnell.com/datasheets/2915218.pdf?src-supplier=Farnell, ComponentLink1URL=http://www.farnell.com/datasheets/2915218.pdf?src-supplier=Farnell, ComponentLink2Description=http://www.farnell.com/datasheets/2915218.pdf?src-supplier=Newark, ComponentLink2URL=http://www.farnell.com/datasheets/2915218.pdf?src-supplier=Newark, ComponentLink3Description=http://www.microchip.com/mymicrochip/filehandler.aspx?ddocname=en589666&src-supplier=Digi-Key, ComponentLink3URL=http://www.microchip.com/mymicrochip/filehandler.aspx?ddocname=en589666&src-supplier=Digi-Key, Manufacturer Part Number=ATMEGA328PB-AU, Price=1.26, RoHS=No, Stock 1=2845, Supplier 1=Farnell
Y1: library part ABM10-166-12.000MHZ-T3, "CRYSTAL 12 MHz SMD 28 pF 10 ppm", Case/Package=SMD/SMT, ESR (Equivalent Series Resistance)=125R, Frequency=12MHz, Frequency Stability=10ppm, Load Capacitance=8pF, Manufacturer=Abracon, Max Operating Temperature=70°C, Min Operating Temperature=-20°C, Supplier Part Number 1=2849406, Category=Crystals, ComponentLink1Description=http://www.farnell.com/datasheets/2581417.pdf?src-supplier=Farnell, ComponentLink1URL=http://www.farnell.com/datasheets/2581417.pdf?src-supplier=Farnell, ComponentLink2Description=https://abracon.com/Resonators/ABM10-XXX_packagedrawing.PDF?src-supplier=Digi-Key, ComponentLink2URL=https://abracon.com/Resonators/ABM10-XXX_packagedrawing.PDF?src-supplier=Digi-Key, Frequency Tolerance=10ppm, Height=0.02inch, Length=0.098inch, Manufacturer Part Number=ABM10-166-12.000MHZ-T3, Mount="Surface Mount", Packaging="Tape and Reel", Price=0.41, RoHS=Yes, Stock=5674, Supplier 1=Farnell, Width=0.079inch

## Via types
v1: diameter 0.6, hole 0.3, Top Layer to Bottom Layer, tented both sides, 54 vias
v2: diameter 0.6, hole 0.3, Top Layer to Bottom Layer, 13 vias
v3: diameter 0.9, hole 0.5, Top Layer to Bottom Layer, 4 vias

## Nets (pads, with @x,y where several pads share a name; then routed paths per layer and width w, separated by ;. In a path a pad name is that pad's centre, name@x,y a point inside that pad or via, vN(x,y) a via of type N, cw(c..) or ccw(c..) an arc to the next point about the centre after c; other vN are vias at no path point)
+3.3V: C7.+ C8.1 C9.1 ICSP.2 PROG.2 R6.1 U1.4 U1.18 | length 60.2
  Top Layer w0.61: ICSP.2 24.29,12.475 24.57,12.755 R6.1 v3(25.8,14.5) ; U1.4 C8.1 31.49,4.075 v3@32.64,2.925 ; U1.18 C9.1 36.75,17.4 v3(41.59,12.56) ; v3(40.2,6) 40.2,11.17 v3(41.59,12.56) ; PROG.2 C7.+ v3(41.59,12.56)
  Bottom Layer w0.61: v3(25.8,14.5) 26.875,15.575 34.941,15.575 37.956,12.56 v3(41.59,12.56) ; v3(32.641,2.925) 37.125,2.925 v3(40.2,6)
+5: C1.1 J1.1 L1.2 | length 3.9
  Top Layer w0.813: J1.1 L1.2 C1.1
FV1_RST: PROG.3 U1.13 | length 12.1
  Top Layer w0.152: U1.13 38.75,11.725 v2(39.075,11.4)
  Bottom Layer w0.152: v2(39.075,11.4) 44.225,11.4 45.605,10.02 PROG.3
GND: C7.- C8.2 C9.2 C10.2 C11.2 ICSP.1 PROG.1 U1.5 U1.21
  other v1: 2.575,0.65 8.875,0.65 15.175,0.65 21.476,0.65 27.075,0.65 33.375,0.65 39.676,0.65 45.976,0.65 36.565,1.4 24.725,2.175 38.39,2.7 0.575,3.7 33.04,4.1 40.975,4.4 48.951,4.498 35.575,6.475 37.475,7.3 27.5,7.4 44.3,7.9 32.29,8.5 25.975,9.4 30.4,9.5 32.7,9.85 38.55,9.85 0.575,10 29.5,10.4 31.45,10.525 44.05,10.525 48.951,10.799 37.675,11.125 45.9,11.3 34.6,11.4 30.575,11.475 32.4,11.5 31.6,12.5 24.1,13.745 31.49,14.2 37.525,15.025 42.6,15.38 45.5,15.38 40.975,15.65 0.575,16.3 44.05,16.9 48.951,17.099 24.725,17.825 32.34,18.5 2.575,19.4 8.875,19.4 15.175,19.4 21.476,19.4 27.075,19.4 33.375,19.4 39.676,19.4 45.976,19.4
MISO: ICSP.5 U1.16 | length 15.4
  Top Layer w0.152: ICSP.5 v2(24.29,8.665) ; v2(32.6,12.615) 33.475,12.615 34.976,14.116 36.131,14.116 U1.16
  Bottom Layer w0.152: v2(24.29,8.665) 28.65,8.665 v2(32.6,12.615)
MOSI: ICSP.6 U1.15 | length 16.3
  Top Layer w0.152: ICSP.6 23.32,7.075 24.075,7.075 24.598,6.552 v2(26.08,6.552) ; v2(33.4,11.589) 35.136,13.325 U1.15
  Bottom Layer w0.152: v2(26.08,6.552) 28.363,6.552 v2(33.4,11.589)
NetD1_2: D1.2 R1.2 | length 3.2
  Top Layer w0.254: R1.2 15.825,5.325 17.052,6.552 17.077,6.552 17.35,6.825 D1.2
NetD2_2: D2.2 R4.2 | length 7.9
  Top Layer w0.254: D2.2 20,8.7 20.5,9.2 20.5,12.25 18.95,13.8 R4.2
NetD3_2: D3.2 R5.2 | length 4.9
  Top Layer w0.254: R5.2 17.3,13.45 18.95,11.8 D3.2
NetIC1_8: IC1.8 R3.2 | length 2.9
  Top Layer w0.152: R3.2 9.9,13.05 10.986,14.136 11.201,14.136 11.35,14.285 IC1.8
NetIC1_9: IC1.9 R2.2 | length 2.8
  Top Layer w0.152: R2.2 10.1,9.95 10.986,9.064 11.201,9.064 11.35,8.915 IC1.9
RST: ICSP.3 R6.2 U1.29 | length 4.9
  Top Layer w0.152: ICSP.3 23.17,11.375 25.63,11.375 26.08,10.925 U1.29
RX: IC1.4 U1.31 | length 18.4
  Top Layer w0.152: v2(13.95,12.525) IC1.4 ; v2(25.05,7.625) 26.75,9.325 U1.31
  Bottom Layer w0.152: v2(13.95,12.525) 18.85,7.625 v2(25.05,7.625)
RX_LED: D2.1 IC1.16 | length 1.5
  Top Layer w0.254: IC1.16 D2.1
SCK: ICSP.4 U1.17 | length 14.4
  Top Layer w0.152: ICSP.4 23.163,10.098 24.062,10.098 v2(24.444,10.48) ; v2(33.133,13.8) 33.615,13.8 34.69,14.875 U1.17
  Bottom Layer w0.152: v2(24.444,10.48) 28.68,10.48 32,13.8 v2(33.133,13.8)
SCL: PROG.5 U1.28 | length 22.7
  Top Layer w0.152: U1.28 27.776,11.589 29.511,11.589 31.975,9.125 v2(33.3,9.125)
  Bottom Layer w0.152: v2(33.3,9.125) 41.8,9.125 45.949,4.976 47.464,4.976 PROG.5
SDA: PROG.4 U1.27 | length 21.9
  Top Layer w0.152: U1.27 30.425,12.525 32.425,10.525 v2(34.2,10.525)
  Bottom Layer w0.152: v2(34.2,10.525) 42.939,10.525 45.984,7.48 PROG.4
TX: IC1.1 U1.30 | length 14.8
  Top Layer w0.152: v2@15.9,13.175 IC1.1 ; v2(25.1,9.55) 25.539,9.989 27.504,9.989 U1.30
  Bottom Layer w0.152: v2(15.9,13) 19.4,9.5 ; 19.4,9.55 v2(25.1,9.55)
TX_LED: D3.1 IC1.15 | length 3.6
  Top Layer w0.254: IC1.15 15.25,9.95 15.8,10.5 D3.1
USB_GND: C1.2 C2.2 C3.- C4.2 C5.2 C6.2 D1.1 IC1.5 IC1.13 J1.4
USBDM: C5.1 J1.2 R2.1 | length 4.1
  Top Layer w0.152: J1.2 5.625,8.7 7.3,8.7 C5.1 R2.1
USBDP: C6.1 J1.3 R3.1 | length 4.1
  Top Layer w0.152: J1.3 5.825,11.5 C6.1 R3.1
VCCIO: C4.1 IC1.3 IC1.10 IC1.11 R4.1 R5.1 | length 13.6
  Top Layer w0.254: IC1.10 IC1.11 12.675,8.725 12.675,9.9 14.875,12.1 14.875,13.025 14.6,13.3 IC1.3 C4.1 R5.1 R4.1
Vr: C2.1 C3.+ IC1.12 L1.1 R1.1 | length 7.8
  Top Layer w0.254: C2.1 IC1.12
  Top Layer w0.813: L1.1 C3.+ 11.125,6.632 11.393,6.9 C2.1 R1.1
XTAL1: C10.1 U1.7 Y1.1 | length 5.2
  Top Layer w0.152: U1.7 34.06,6.905 34.06,4.729 34.29,4.499 34.591,4.499 Y1.1 C10.1
XTAL2: C11.1 U1.8 Y1.2 | length 5
  Top Layer w0.152: U1.8 36.09,7.075 36.765,6.4 Y1.2 C11.1
pads on no net: IC1.2 IC1.6 IC1.7 IC1.14 ICSP. J1. J1.5 U1.1 U1.2 U1.3 U1.6 U1.9 U1.10 U1.11 U1.12 U1.14 U1.19 U1.20 U1.22 U1.23 U1.24 U1.25 U1.26 U1.32 Y1.

## Polygon pours and split planes (outlines as drawn)
GND on Top Layer "Top Layer-GND" (solid, pour order 10): 23,0 23,1.5 26.5,1.5 26.5,0 40.25,0 40.25,3.75 41.75,3.75 41.75,0 47.5,0 47.5,2 49.5,2 49.5,18 47.5,18 47.5,20 41.75,20 41.75,16.25 40.25,16.25 40.25,20 26.5,20 26.5,18.5 23,18.5 23,20 21.75,20 2,20 2,18.25 2,18 0,18 0,2 2,2 2,1.75 4.5,1.75 4.5,3.5 1.5,3.5 1.5,16.5 4.5,16.5 4.5,18.25 21.75,18.25 21.75,1.75 2,1.75 2,0
USB_GND on Top Layer "USB_GND_L01_P000" (solid, pour order 0): 1.7,15.8 1.7,4.2 4.6,4.2 4.6,1.75 21.75,1.75 21.75,18.25 4.6,18.25 4.6,15.8
GND on Bottom Layer "GND_L02_P002" (solid, pour order 2): 2,20 23,20 23,18.5 26.5,18.5 26.5,20 40.25,20 40.25,16.25 41.75,16.25 41.75,20 47.5,20 47.5,18 49.5,18 49.5,2 47.5,2 47.5,0 41.75,0 41.75,3.75 40.25,3.75 40.25,0 26.5,0 26.5,1.5 23,1.5 23,0 2,0 2,2 0,2 0,18 2,18

## Silkscreen, mask and mechanical layers (free items; w line width, h text height)
Route Tool Path:
  lines w1.4: -0.7,2 ccw(c0,2) 0,1.3 ; -0.7,2 ccw(c0,2) 0,1.3 ; -0.7,2 -0.7,18 ; -0.7,18 cw(c0,18) 0,18.7 ; -0.7,18 cw(c0,18) 0,18.7 ; 0,1.3 1.3,1.3 1.3,0 ; 0,18.7 1.3,18.7 1.3,20 ; 1.3,0 ccw(c2,0) 2,-0.7 ; 1.3,0 ccw(c2,0) 2,-0.7 ; 1.3,20 cw(c2,20) 2,20.7 ; 1.3,20 cw(c2,20) 2,20.7 ; 2,-0.7 23,-0.7 ; 2,20.7 23,20.7 ; 23,-0.7 ccw(c23,0) 23.7,0 ; 23,-0.7 ccw(c23,0) 23.7,0 ; 23,20.7 cw(c23,20) 23.7,20 ; 23,20.7 cw(c23,20) 23.7,20 ; 23.7,0 23.7,0.8 25.8,0.8 25.8,0 ; 23.7,20 23.7,19.2 25.8,19.2 25.8,20 ; 25.8,0 ccw(c26.5,0) 26.5,-0.7 ; 25.8,0 ccw(c26.5,0) 26.5,-0.7 ; 25.8,20 cw(c26.5,20) 26.5,20.7 ; 25.8,20 cw(c26.5,20) 26.5,20.7 ; 26.5,-0.7 40.25,-0.7 ; 26.5,20.7 40.25,20.7 ; 40.25,-0.7 ccw(c40.25,0) 40.95,0 ; 40.25,-0.7 ccw(c40.25,0) 40.95,0 ; 40.25,20.7 cw(c40.25,20) 40.95,20 ; 40.25,20.7 cw(c40.25,20) 40.95,20 ; 40.95,0 40.95,3.05 41.05,3.05 41.05,0 ; 40.95,20 40.95,16.95 41.05,16.95 41.05,20 ; 41.05,0 ccw(c41.75,0) 41.75,-0.7 ; 41.05,0 ccw(c41.75,0) 41.75,-0.7 ; 41.05,20 cw(c41.75,20) 41.75,20.7 ; 41.05,20 cw(c41.75,20) 41.75,20.7 ; 41.75,-0.7 47.5,-0.7 ; 41.75,20.7 47.5,20.7 ; 47.5,-0.7 ccw(c47.5,0) 48.2,0 ; 47.5,-0.7 ccw(c47.5,0) 48.2,0 ; 47.5,20.7 cw(c47.5,20) 48.2,20 ; 47.5,20.7 cw(c47.5,20) 48.2,20 ; 48.2,0 48.2,1.3 49.5,1.3 ; 48.2,20 48.2,18.7 49.5,18.7 ; 49.5,1.3 ccw(c49.5,2) 50.2,2 ; 49.5,1.3 ccw(c49.5,2) 50.2,2 ; 49.5,18.7 cw(c49.5,18) 50.2,18 ; 49.5,18.7 cw(c49.5,18) 50.2,18 ; 50.2,2 50.2,18